# EAGLE board ElectgplCardTop_v2 (EAGLE 8.3.0)

Size 85.34 x 53.85 mm. Coordinates in mm from the lower left corner, seen from the top.
Outline: 0,0 0,53.85 85.34,53.85 85.34,0 0,0
Copper layers (1*16): Top 0.035mm / dielectric 1.5mm / Bottom 0.035mm
Design rules "adafruit_rules_1": minimum track width 8mil, minimum drill 15.5mil, track to track 8mil, track to pad 8mil, pad to pad 8mil, via to via 8mil, smd to smd 8mil, copper to edge 10mil, drill to drill 8mil, minimum pad ring 10mil, minimum via ring 8mil, stop-mask expansion 4mil, vias tented up to drill 25mil, thermal gap 10mil

## Footprints (pad centres in the part's own frame; a part is rotated, then mirrored left to right if it is on the bottom)
DO35Z7 = drill 0.813 long: A 3.81,0; C -3.81,0
0402 = smd 0.5 x 0.6: 1 -0.5,0; 2 0.5,0
0603 = smd 0.6 x 0.9: 1 -0.75,0; 2 0.75,0
0805 = smd 1.2 x 1.3: 1 -1.05,0; 2 1.05,0
1206 = smd 0.9 x 1.6: 1 -1.45,0; 2 1.45,0
1210 = smd 1 x 2.8: 1 -1.5,0; 2 1.5,0
2010 = smd 1 x 2.8: P$1 -2.3,0; P$2 2.3,0
DPAK = smd 1.6 x 3: 1 -2.28,-5.31; 3 2.28,-5.31 | smd 4.826 x 5.715: 4 0,1.588
D2PAK = smd 1.6 x 3.5: 1 -2.54,-8.275; 3 2.54,-8.275 | smd 12.2 x 9.75: TAB 0,2
SOT223 = smd 1.219 x 2.235: 1 -2.311,-3.099; 2 0,-3.099; 3 2.311,-3.099 | smd 3.6 x 2.2: 4 0,3.099
SOT89 = smd 0.58 x 1.2: 1 -1.5,-1.8; 2 0,-1.8; 3 1.5,-1.8 | smd 2 x 2: 4 0,1.3
SOT23-5 = smd 0.55 x 1.2: 1 -0.95,-1.3; 2 0,-1.3; 3 0.95,-1.3; 4 0.95,1.3; 5 -0.95,1.3
SOT23-3 = smd 0.8 x 0.9: 1 -0.95,-1; 2 0.95,-1; 3 0,1.1
SC70 = smd 0.4 x 0.75: 1 -0.65,-0.825; 2 0,-0.825; 3 0.65,-0.825; 4 0.65,0.825; 5 -0.65,0.825
CRYSTAL-SMD-5X3.2 = smd 1.8 x 1.2: 1 -2,-1.2; 2 2,-1.2; 3 2,1.2; 4 -2,1.2
CRYSTAL-SMD-3.2X2.5 = smd 1.4 x 1.2: 1 -1.2,-0.95; 2 1.2,-0.95; 3 1.2,0.95; 4 -1.2,0.95
HC49UP = smd 5.334 x 1.93: 1 -4.826,0; 2 4.826,0
XTAL-2X1.2 = smd 1 x 1.4: P$1 -0.85,0; P$2 0.85,0
SMA-DIODE = smd 1.27 x 1.47: A -2.15,0; C 2.15,0
SMB-DIODE = smd 2.4 x 2.4: A 2.2,0; C -2.2,0
SMC = smd 2.8 x 3.8: A 3.7,0; C -3.7,0
QFN-24 = smd 0.8 x 0.25: 1 -2,1.25; 2 -2,0.75; 3 -2,0.25; 4 -2,-0.25; 5 -2,-0.75; 6 -2,-1.25; 13 2,-1.25; 14 2,-0.75; 15 2,-0.25; 16 2,0.25; 17 2,0.75; 18 2,1.25 | smd 0.25 x 0.8: 7 -1.25,-2; 8 -0.75,-2; 9 -0.25,-2; 10 0.25,-2; 11 0.75,-2; 12 1.25,-2; 19 1.25,2; 20 0.75,2; 21 0.25,2; 22 -0.25,2; 23 -0.75,2; 24 -1.25,2
TSSOP16 = smd 0.35 x 1.6: 1 -2.225,-2.85; 2 -1.575,-2.85; 3 -0.925,-2.85; 4 -0.275,-2.85; 5 0.375,-2.85; 6 1.025,-2.85; 7 1.675,-2.85; 8 2.325,-2.85; 9 2.325,3.05; 10 1.675,3.05; 11 1.025,3.05; 12 0.375,3.05; 13 -0.275,3.05; 14 -0.925,3.05; 15 -1.575,3.05; 16 -2.225,3.05
SO08 = smd 0.61 x 2.21: 1 -1.905,-2.616; 2 -0.635,-2.616; 3 0.635,-2.616; 4 1.905,-2.616; 5 1.905,2.616; 6 0.635,2.616; 7 -0.635,2.616; 8 -1.905,2.616
TQFP32-5MM = smd 1.143 x 0.254: 1 -3.5,1.75; 2 -3.5,1.25; 3 -3.5,0.75; 4 -3.5,0.25; 5 -3.5,-0.25; 6 -3.5,-0.75; 7 -3.5,-1.25; 8 -3.5,-1.75; 17 3.5,-1.75; 18 3.5,-1.25; 19 3.5,-0.75; 20 3.5,-0.25; 21 3.5,0.25; 22 3.5,0.75; 23 3.5,1.25; 24 3.5,1.75 | smd 0.254 x 1.143: 9 -1.75,-3.5; 10 -1.25,-3.5; 11 -0.75,-3.5; 12 -0.25,-3.5; 13 0.25,-3.5; 14 0.75,-3.5; 15 1.25,-3.5; 16 1.75,-3.5; 25 1.75,3.5; 26 1.25,3.5; 27 0.75,3.5; 28 0.25,3.5; 29 -0.25,3.5; 30 -0.75,3.5; 31 -1.25,3.5; 32 -1.75,3.5
LED3MM = drill 0.813 octagon: A -1.27,0; K 1.27,0
LED5MM = drill 0.813 octagon: A -1.27,0; K 1.27,0
TO92- = drill 0.813 long: 1 2.54,0; 2 0,0; 3 -2.54,0
TO220ABS = drill 1.016 long: A1 -2.54,-2.54; A2 2.54,-2.54; C 0,-2.54
RTRIM64W = drill 0.61: 1 1.27,-2.54; 2 1.27,0; 3 1.27,2.54

## Placement (x,y rotation side)
DO35  [DO35Z7]  16.26,25.91 0 top
E$1  [EDGE-MILLIMETERS]  2.47,2.29 0 top
E$2  [EDGE-MILLIMETERS]  12.47,2.29 0 top
E$3  [EDGE-MILLIMETERS]  22.47,2.29 0 top
E$4  [EDGE-MILLIMETERS]  32.47,2.29 0 top
E$5  [EDGE-MILLIMETERS]  42.47,2.29 0 top
E$6  [EDGE-MILLIMETERS]  52.47,2.29 0 top
E$7  [EDGE-MILLIMETERS]  62.47,2.29 0 top
E$8  [EDGE-MILLIMETERS]  72.47,2.29 0 top
E$9  [OSHW-LOGO-M]  79.76,12.7 0 top
E$17  [EDGE-INCHES-EIGTH]  4.32,51.05 0 top
E$18  [EDGE-INCHES-EIGTH]  29.72,51.05 0 top
E$19  [EDGE-INCHES-EIGTH]  55.12,51.05 0 top
E$23  [0402]  35.05,30.99 180 top
E$24  [0603]  35.36,32.51 180 top
E$25  [0805]  35.94,34.04 180 top
E$26  [1206]  36.2,35.99 180 top
E$27  [1210]  36.3,38.71 0 top
E$28  [2010]  37.08,42.04 180 top
E$29  [DPAK]  70.48,32.26 90 top
E$30  [D2PAK]  71.88,20.57 0 top
E$31  [SOT223]  58.93,32.77 0 top
E$32  [SOT89]  75.18,39.62 0 top
E$33  [SOT23-5]  65.28,38.61 90 top
E$34  [SOT23-3]  69.85,38.86 0 top
E$35  [SC70]  60.2,39.62 90 top
E$36  [CRYSTAL-SMD-5X3.2]  4.29,18.41 270 top
E$37  [CRYSTAL-SMD-3.2X2.5]  9.8,18.8 180 top
E$39  [HC49UP]  9.91,12.19 0 top
E$40  [XTAL-2X1.2]  16.26,18.03 180 top
E$43  [SMA-DIODE]  44.68,41.81 0 top
E$44  [SMB-DIODE]  44.7,34.16 90 top
E$45  [SMC]  50.77,35.33 90 top
E$50  [NMOS-SYMB]  54.36,13.46 0 top
E$51  [PMOS-SYMB]  46.48,13.46 0 top
E$52  [DIODE-SYMB]  56.64,19.56 0 top
E$53  [LED-GUIDE]  45.47,19.3 270 top
E$54  [NPN-SYMB]  38.86,12.19 0 top
E$55  [QFN-24]  22.35,20.07 0 top
E$56  [TSSOP16]  22.35,13.21 270 top
E$57  [SO08]  30.73,12.19 270 top
E$58  [TQFP32-5MM]  30.73,19.3 0 top
E$59  [PNP-SYMB]  38.86,19.56 0 top
E$61  [0402]  39.12,30.99 180 top
E$62  [0603]  38.84,32.51 180 top
LED3MM  [LED3MM]  5.08,41.4 270 top
LED5MM  [LED5MM]  5.08,27.69 90 top
TO92  [TO92-]  29.72,27.18 180 top
TO220  [TO220ABS]  58.67,22.35 180 top
TRIMMER  [RTRIM64W]  43.69,25.91 90 top

## Library data of the parts
DO35 TO92 TO220 TRIMMER = ref-packages-longpad
E$1-E$8 E$17-E$19 E$23-E$37 E$39 E$40 E$43-E$45 E$50-E$59 E$61 E$62 = Reference Ruler
E$9 = SparkFun-Aesthetics
LED3MM LED5MM = led

## Tracks (layer width: path | path; a pad name or v marks a point on that pad's centre or on a via)
(copper drawn outside any net)
  shapes: Top area x8

## Text on the board
tPlace: 1/8 | 1/4 | 3/8 | 1/2 | Inch | 0 | 1 | SMA | 2 | 3 | SOT89 | Trace Width (mil) | 2010(5025) | SC70 | 6 | SOT23 | 8 | 1210(3225) | SMB | 10 | 12 | 1206(3216) | SMC | 18 | 0805(2012) / 0603(1608) / 0402(1005) | 24 | SOT223 | 30 | DPAK | 40 | SMD R/C/L | 5X3.2 | XTAL/OSC | QFN | Electgpl | QFP | 3.2X2.4 | 2X1.2 | 80 | 60 | HC49 | 50 | SSOP | SOIC | Font Size | 40mil | D2PAK | 0 | mm | 1 | 2 | 3 | 4 | 5 | 6 | 7 | 8